# Altium PCB RENEWAA.PcbDoc
Units mil, origin at the board's own origin, x right, y up, seen from the top; angles counter-clockwise.
Board outline 3250 x 1285 mil, 2 copper layers (Top Layer, Bottom Layer); 17 components, 16 nets, 111 pads, 19 vias.
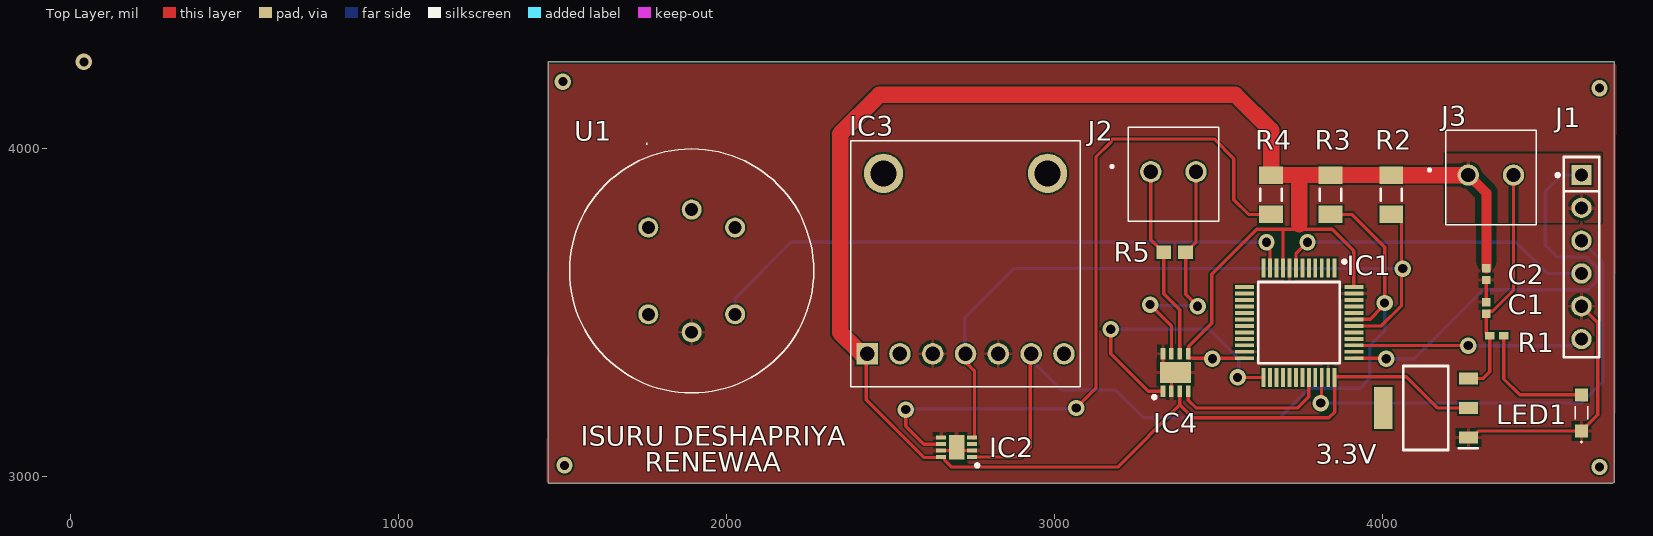
[diagram p0: Top Layer view]
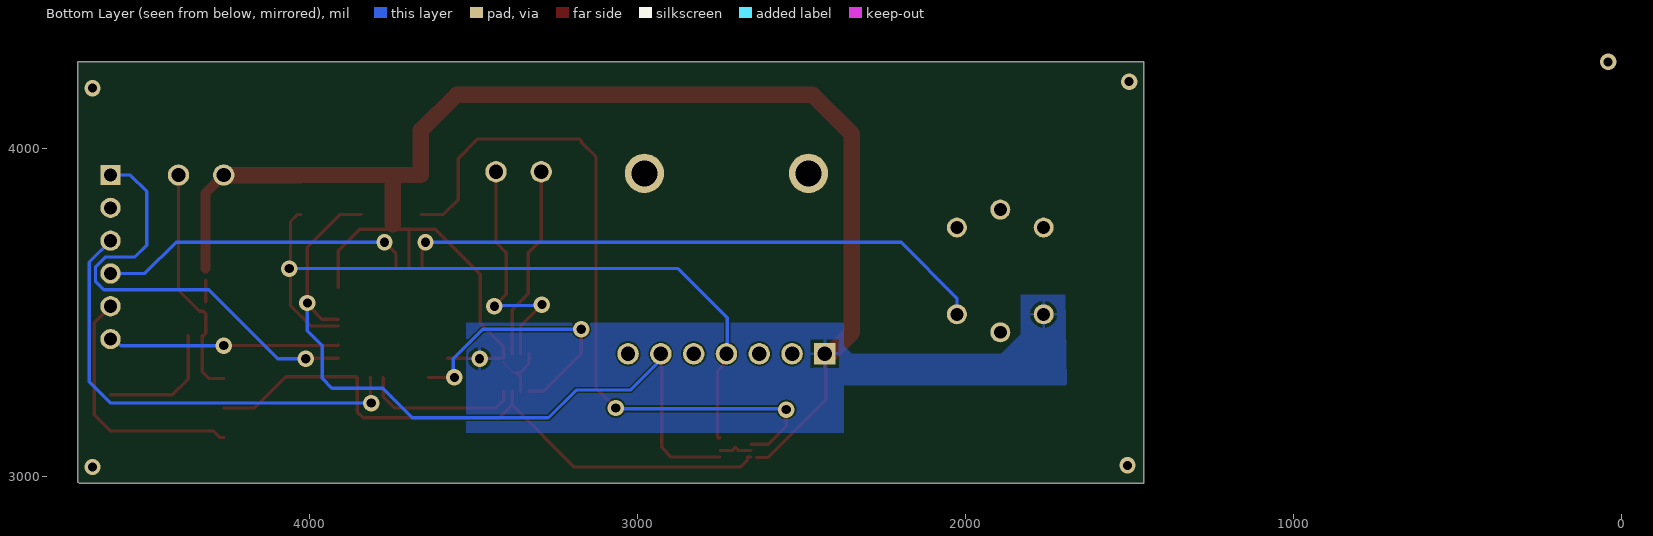
[diagram p1: Bottom Layer view, seen from below]
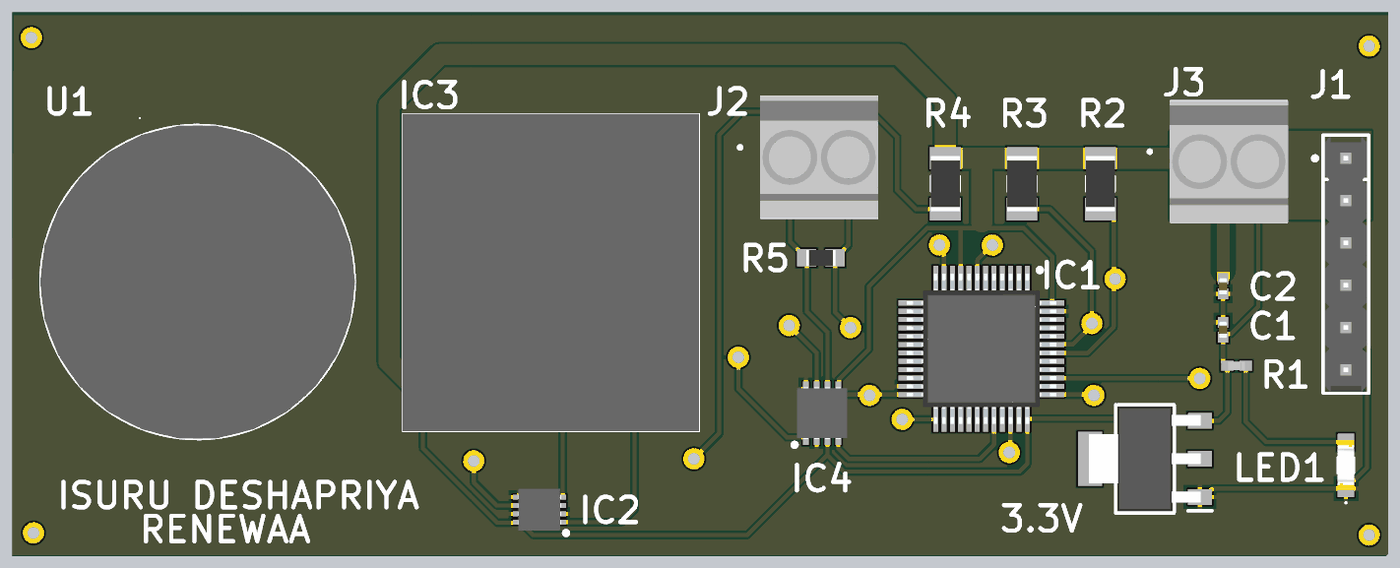
[diagram p2: 3D render of the assembled board from above, using the file's embedded part models]

## Layer stack, top to bottom
Top Solder: solder mask 0.4, Solder Resist, Dk 3.5
Top Layer: signal copper 1.4
Dielectric 1: dielectric 12.6, FR-4, Dk 4.8
Bottom Layer: signal copper 1.4
Bottom Solder: solder mask 0.4, Solder Resist, Dk 3.5

## Board outline
1455,4265 4705,4265 4705,2985 4700,2980 1455,2980

## Design rules (kind name [scope] priority, off if disabled: settings)
Clearance [All] p1: gap=5 ignorepadtopadclearanceinfootprint=FALSE except(1: Poly-Text Text-Text Text-Hole; 10: Poly-Poly Poly-Region)
PolygonConnect [All] p1: connectstyle=Relief reliefconductorwidth=10 reliefentries=4 polygonreliefangle="90 Angle" airgapwidth=10
RoutingVias [All] p1: holewidth=28 width=50 viastyle="Through Hole" minholewidth=28 minwidth=50 maxholewidth=28 maxwidth=50
SolderMaskExpansion [All] p1: expansion=4 istentingtop=FALSE
UnpouredPolygon [All] p1: allowunpoured=TRUE allowshelved=TRUE
Width [All] p1: maxlimit=50 minlimit=5 preferedwidth=5 minimp=50.000000 maximp=50.000000 favimp=50.000000
29 further rules are at their usual default settings.

## Components (designator, comment, footprint, x,y, rotation, side; value= is the part's Value field where it differs from the comment)
3.3V "AMS1117-3.3" SOT229P700X180-4N 4130.36,3210 r180 top
C1 "0.1uF" CAPC1005X56N 4315,3515 r90 top
C2 "0.1uF" CAPC1005X56N 4315,3617.72 r270 top
IC1 "stm32f103c8t6" QFP50P900X900X160-48N 3744.37,3470 r270 top
IC2 "SHT31" SON50P250X250X100-9N-D 2700,3090 r180 top
IC3 "BMP280" 2651 2427.47,3375 r0 top
IC4 "MCP2562-E_MF" SON65P300X300X100-9N-D 3367.8,3317.91 r90 top
J1 "22-28-4060" FP-22-28-4060-MFG 4605,3670 r270 top
J2 "39357-0002" 393570002 3292.2,3930 r0 top
J3 "39357-0002" 393570002 4260,3920 r0 top
LED1 "INPUT_IND" 1221S2CFR2S2L2C 4605,3194.88 r90 top
R1 "220" RESC1005X40N 4346.65,3430 r180 top
R2 "4.7k" RESC3216X60X45ML15T20 4025,3860 r90 top
R3 "4.7k" RESC3216X60X45ML15T20 3840,3860 r90 top
R4 "4.7k" RESC3216X60X45ML15T20 3658.77,3860 r90 top
R5 "120" RESC1609X55X30ML15T15 3365,3685.15 r180 top
U1 "Gas Sensor" 60500009 1760.51,3495.51 r0 top

## Footprints (in the part's own frame and the unit in brackets; to place one, negate y for a bottom-side part, rotate by r counter-clockwise, add the part's x,y. Pads: shape width x height; smd on the part's side, far side on the other; paste and mask are expansions set on the pad)
1221S2CFR2S2L2C [mm]
  rect 1x1 smd: 1(-1.4,0) 2(1.4,0)
  silkscreen extent -2.3,-0.5 0.5,0.5, body extent -1.5,-0.5 1.5,0.5, height 1.94
2651 [mm]
  rect 1.665x1.665 hole 1.11: 1(0,0)
  round 1.665 hole 1.11: 2(2.54,0) 3(5.08,0) 4(7.62,0) 5(10.16,0) 6(12.7,0) 7(15.24,0)
  round 3.048 hole 2.032: MH1(1.27,13.97) MH2(13.97,13.97)
  silkscreen extent -1.27,-2.54 16.51,16.51, body extent -1.27,-2.54 16.51,16.51, height 3.1
60500009 [mm]
  round 1.55 hole 1: 1(0,0) 2(3.359,-1.391) 3(6.718,0) 4(6.718,6.718) 5(3.359,8.109) 6(0,6.718)
  silkscreen extent -6.09,-6.09 12.81,13.23, body extent -6.09,-6.09 12.81,12.81, height 10.1
393570002 [mm]
  round 1.65 hole 1.1: 1(0,0) 2(3.5,0)
  silkscreen extent -3.1,-3.84 5.25,3.45, body extent -1.82,-3.84 5.3,3.44, height 8.43
CAPC1005X56N [mm]
  rect 0.65x0.64 smd: 1(-0.45,0) 2(0.45,0)
  body extent -0.5,-0.25 0.5,0.25, height 0.56
FP-22-28-4060-MFG [mm]
  rect 1.57x1.57 hole 1.02 paste-1000 mask+0: 1(-6.35,0)
  round 1.57 hole 1.02 paste-1000 mask+0: 2(-3.81,0) 3(-1.27,0) 4(1.27,0) 5(3.81,0) 6(6.35,0)
  silkscreen extent -7.75,-1.97 7.75,1.37, body extent -7.85,-1.47 7.85,1.47, height 0.25
QFP50P900X900X160-48N [mm]
  rect 1.475x0.3 smd: 1(-4.238,2.75) 2(-4.238,2.25) 3(-4.238,1.75) 4(-4.238,1.25) 5(-4.238,0.75) 6(-4.238,0.25) 7(-4.238,-0.25) 8(-4.238,-0.75) 9(-4.238,-1.25) 10(-4.238,-1.75) 11(-4.238,-2.25) 12(-4.238,-2.75) 25(4.238,-2.75) 26(4.238,-2.25) 27(4.238,-1.75) 28(4.238,-1.25) 29(4.238,-0.75) 30(4.238,-0.25) 31(4.238,0.25) 32(4.238,0.75) 33(4.238,1.25) 34(4.238,1.75) 35(4.238,2.25) 36(4.238,2.75)
  rect 0.3x1.475 smd: 13(-2.75,-4.238) 14(-2.25,-4.238) 15(-1.75,-4.238) 16(-1.25,-4.238) 17(-0.75,-4.238) 18(-0.25,-4.238) 19(0.25,-4.238) 20(0.75,-4.238) 21(1.25,-4.238) 22(1.75,-4.238) 23(2.25,-4.238) 24(2.75,-4.238) 37(2.75,4.238) 38(2.25,4.238) 39(1.75,4.238) 40(1.25,4.238) 41(0.75,4.238) 42(0.25,4.238) 43(-0.25,4.238) 44(-0.75,4.238) 45(-1.25,4.238) 46(-1.75,4.238) 47(-2.25,4.238) 48(-2.75,4.238)
  silkscreen extent -4.85,-3.15 3.15,3.63, body extent -4.5,-4.5 4.5,4.5, height 1.6
RESC1005X40N [mm]
  rect 0.75x0.6 smd: 1(-0.55,0) 2(0.55,0)
  body extent -0.5,-0.25 0.5,0.25, height 0.35
RESC1609X55X30ML15T15 [mm] "Chip Resistor, 2-Leads, Body 1.75x0.95mm, IPC Low Density"
  rect 1.15x1.05 smd: 1(-0.85,0) 2(0.85,0)
  body extent -0.87,-0.48 0.87,0.48, height 0.55
RESC3216X60X45ML15T20 [mm] "Chip Resistor, 2-Leads, Body 3.3x1.75mm, IPC Low Density"
  rect 1.35x1.85 smd: 1(-1.525,0) 2(1.525,0)
  silkscreen extent -0.45,-0.82 0.45,0.82, body extent -1.65,-0.87 1.65,0.87, height 0.6
SON50P250X250X100-9N-D [mm]
  rect 0.8x0.3 smd: 1(-1.2,0.75) 2(-1.2,0.25) 3(-1.2,-0.25) 4(-1.2,-0.75) 5(1.2,-0.75) 6(1.2,-0.25) 7(1.2,0.25) 8(1.2,0.75)
  rect 1.2x1.9 smd: 9(0,0)
  silkscreen extent -1.73,1.28 -1.48,1.52, body extent -1.3,-1.25 1.3,1.25, height 1
SON65P300X300X100-9N-D [mm]
  rect 0.9x0.35 smd: 1(-1.45,0.975) 2(-1.45,0.325) 3(-1.45,-0.325) 4(-1.45,-0.975) 5(1.45,-0.975) 6(1.45,-0.325) 7(1.45,0.325) 8(1.45,0.975)
  rect 1.6x2.4 smd: 9(0,0)
  silkscreen extent -2.02,1.52 -1.78,1.77, body extent -1.55,-1.5 1.55,1.5, height 1
SOT229P700X180-4N [mm]
  rect 1.45x0.95 smd: 1(-3.3,2.29) 2(-3.3,0) 3(-3.3,-2.29)
  rect 1.45x3.25 smd: 4(3.3,0)
  silkscreen extent -4.03,-3.25 1.75,3.25, body extent -3.35,-3.15 3.35,3.15, height 1.8

## Part data
3.3V: "Integrated Circuit", Manufacturer_Name=Advanced, Datasheet Link=https://datasheet.datasheetarchive.com/originals/distributors/Datasheets-28/DSA-550594.pdf, Height=1.8mm, Manufacturer_Part_Number=AMS1117-3.3
C1 C2: library part 04024D106MAT2A, "Capacitor", Manufacturer_Name="Kyocera AVX", Mouser Part Number=581-04024D106MAT2A, Datasheet Link=http://www.mouser.com/catalog/supplier/library/pdf/AVXSurfaceMountCeramic.pdf, Height=0.56mm, Manufacturer_Part_Number=04024D106MAT2A, Mouser Price/Stock=https://www.mouser.co.uk/ProductDetail/KYOCERA-AVX/04024D106MAT2A?qs=NBFAU1oqP4W0zKsr62mI7A%3D%3D
IC1: "Integrated Circuit", Arrow Part Number=STM32F103C8T6, Manufacturer_Name=STMicroelectronics, Mouser Part Number=511-STM32F103C8T6, Arrow Price/Stock=https://www.arrow.com/en/products/stm32f103c8t6/stmicroelectronics?utm_currency=USD&region=nac, Datasheet Link=http://media.digikey.com/pdf/Data%20Sheets/ST%20Microelectronics%20PDFS/STM32F103x8,B.pdf, Height=1.6mm, Manufacturer_Part_Number=stm32f103c8t6, Mouser Price/Stock=https://www.mouser.co.uk/ProductDetail/STMicroelectronics/STM32F103C8T6?qs=bhCVus9SdFtq6kqxsU5%2FDA%3D%3D
IC2: library part SHT31-DIS-B10KS, "Integrated Circuit", Manufacturer_Name=Sensirion, Mouser Part Number=403-SHT31-DIS-B10KS, Arrow Part Number=SHT31-DIS-B10KS, Arrow Price/Stock=https://www.arrow.com/en/products/sht31-dis-b10ks/sensirion-ag?utm_currency=USD&region=nac, Datasheet Link=https://www.arrow.com/en/products/sht31-dis-b10ks/sensirion-ag?region=nac, Height=1mm, Manufacturer_Part_Number=SHT31-DIS-B10KS, Mouser Price/Stock=https://www.mouser.co.uk/ProductDetail/Sensirion/SHT31-DIS-B10kS?qs=MLItCLRbWswwYf53rVT5pw%3D%3D
IC3: library part 2651, "Integrated Circuit", Manufacturer_Name=Adafruit, Mouser Part Number=485-2651, Arrow Part Number=2651, Arrow Price/Stock=https://www.arrow.com/en/products/2651/adafruit-industries?region=nac, Datasheet Link=https://learn.adafruit.com/downloads/pdf/adafruit-bmp280-barometric-pressure-plus-temperature-sensor-breakout.pdf, Height=3mm, Manufacturer_Part_Number=2651, Mouser Price/Stock=https://www.mouser.co.uk/ProductDetail/Adafruit/2651?qs=GP1oqPAcsMG0HimHwVa7aA%3D%3D
IC4: "Integrated Circuit", Arrow Part Number=MCP2562-E/MF, Manufacturer_Name=Microchip, Mouser Part Number=579-MCP2562-E/MF, Arrow Price/Stock=https://www.arrow.com/en/products/mcp2562-emf/microchip-technology?region=europe, Datasheet Link=http://uk.rs-online.com/web/p/products/1652039, Height=1mm, Manufacturer_Part_Number=MCP2562-E/MF, Mouser Price/Stock=https://www.mouser.co.uk/ProductDetail/Microchip-Technology/MCP2562-E-MF?qs=6qKXPk0vzx2iHVWjPcssaQ%3D%3D
J1: library part CMP-04776-000763-1, "CONN HEADER VERT 6POS 2.54MM", Color=Black, Contact Resistance=20mR, Current Rating=4A, Max Operating Temperature=75°C, Max Voltage Rating (AC)=250V, Max Voltage Rating (DC)=250.25kV, Min Operating Temperature=0°C, Package Quantity=1, Connector Type="Male Pin", Contact Material=Brass, Contact Mating Length=0.24inch, Contact Plating=Tin, Contact Type="Male Pin", Depth=2.49mm, Gender=Male, Housing Color=Black, Housing Material=Thermoplastic, Length=15.24mm, Mount="Through Hole", Number of Contacts=6, Number of Positions=6, Number of Rows=1, Orientation=Straight, Packaging=Bulk, Pitch=2.54mm, RoHS Compliant=Yes, Series="KK® 42375", Termination=Solder, Voltage Rating=250V
J2 J3: "Connector", Manufacturer_Name=Molex, Mouser Part Number=538-39357-0002, Datasheet Link=https://www.molex.com/pdm_docs/sd/393570002_sd.pdf, Height=8.64mm, Manufacturer_Part_Number=39357-0002, Mouser Price/Stock=https://www.mouser.co.uk/ProductDetail/Molex/39357-0002?qs=c7V%252BsbZfmqvL0V%252BWJEAGdg%3D%3D
LED1: library part 12-21_S2C-FR2S2L_2C, "LED", Manufacturer_Name=Everlight, Manufacturer_Part_Number=12-21/S2C-FR2S2L/2C, Datasheet Link=https://datasheet.lcsc.com/szlcsc/1901141904_Everlight-Elec-12-21-S2C-FR2S2L-2C_C183856.pdf, Height=2.2mm
R1: library part CR0402-FX-2200GLF, "Resistor", Manufacturer_Name=Bourns, Mouser Part Number=652-CR0402FX-2200GLF, Arrow Part Number=CR0402-FX-2200GLF, Arrow Price/Stock=https://www.arrow.com/en/products/cr0402-fx-2200glf/bourns, Datasheet Link=https://www.bourns.com/pdfs/CR0402.pdf, Height=0.4mm, Manufacturer_Part_Number=CR0402-FX-2200GLF, Mouser Price/Stock=https://www.mouser.co.uk/ProductDetail/Bourns/CR0402-FX-2200GLF?qs=JflQ4L8so%2FsKYc57KXfYtQ%3D%3D
R2 R3 R4: library part CMP-2100-03618-1, "Chip Resistor, 4.7 KOhm, +/- 1%, 0.25 W, -55 to 155 degC, 1206 (3216 Metric), RoHS, Tape and Reel", Case Code (Imperial)=1206, Case Code (Metric)=3216, Manufacturer="Vishay Semiconductor", Max Operating Temperature=155degC, Max Power Dissipation=250mW, Min Operating Temperature=-55degC, Package Description="2-Pin Surface Mount Device, Body 3.15 x 1.6 mm", Package Quantity=10, Package Reference=1206.0, Resistance=4.7KOhm, Temperature Coefficient=100ppm/degreesC, Tolerance=1%, Voltage Rating=200V, Case/Package=1206, Composition=ThickFilm, Contact Plating=Tin, Datasheet URL=http://www.vishay.com/docs/20035/dcrcwe3.pdf, Datasheet Version=41061.0, Depth=1.6mm, Height=0.55mm, Lead Free=LeadFree, Length=3.2mm, Manufacturer URL=http://www.vishay.com/, Military Standard=Not, Mount=SurfaceMount, Number of Terminations=2, Packaging=TapeandReel, Power Rating=250mW, Radiation Hardening=No, REACH SVHC=Unknown, RoHSCompliant=true, Termination=SMD/SMT, Voltage Rating (DC)=200V, Weight=0.000353oz, Width=1.6mm
R5: library part CMP-2000-00213-2, "Chip Resistor, 120 Ohm, +/- 1%, 0.1 W, -55 to 155 degC, 0603 (1608 Metric), RoHS, Tape and Reel", Case Code (Imperial)=0603, Case Code (Metric)=1608, Manufacturer=Panasonic, Max Operating Temperature=155degC, Max Power Dissipation=100mW, Min Operating Temperature=-55degC, Package Description="2-Pin Surface Mount Device, Body 1.6 x 0.85 mm", Package Quantity=1, Resistance=120Ohm, Temperature Coefficient=100ppm/degreesC, Tolerance=1%, Voltage Rating=75V, Case/Package=0603, Composition=ThickFilm, Contact Plating=Tin, Datasheet URL=https://industrial.panasonic.com/cdbs/www-data/pdf/RDA0000/AOA0000C283.pdf, Datasheet Version=42095.0, Depth=0.8mm, Height=0.022inch, Lead Free=LeadFree, Length=1.6mm, Manufacturer URL=http://www.panasonic.com/, Military Standard=Not, Mount=SurfaceMount, Number of Pins=2, Number of Terminations=2, Package Reference=0603, Package URL=http://www.st.com/st-web-ui/static/active/en/resource/technical/document/datasheet/CD00001320.pdf, Packaging=TapeandReel, Power Rating=100mW, Radiation Hardening=No, REACH SVHC=NoSVHC, RoHSCompliant=true, Termination=SMD/SMT, Voltage Rating (DC)=75V, Width=0.031inch
U1: library part 605-00009, "MQ-2", Manufacturer_Name=Parallax, Mouser Part Number=619-605-00009, Datasheet Link=https://datasheet.datasheetarchive.com/originals/distributors/DKDS-18/349907.pdf, Height=10mm, Manufacturer_Part_Number=605-00009, Mouser Price/Stock=https://www.mouser.co.uk/ProductDetail/Parallax/605-00009?qs=c8dSG9xvwkc3Fl0aFi4nyw%3D%3D

## Via types
v1: diameter 50, hole 28, Top Layer to Bottom Layer, 19 vias

## Nets (pads, with @x,y where several pads share a name; then routed paths per layer and width w, separated by ;. In a path a pad name is that pad's centre, name@x,y a point inside that pad or via, vN(x,y) a via of type N, cw(c..) or ccw(c..) an arc to the next point about the centre after c; other vN are vias at no path point)
3.3V: 3.3V.2 C2.1 IC1.9 IC1.24 IC1.36 IC1.48 IC2.8 IC3.1 IC4.3 IC4.5 J1.2 J3.1 R2.2 R3.2 R4.2 U1.1 | length 6861.8
  Top Layer w10: IC3.1 2410,3375 2425,3360 2425,3235 2600.75,3059.25 2635,3059.25 ; IC2.8 2662.6,3060.47 2663.5,3059.57 2663.5,3051.33 2684.83,3030 3191.18,3030 3380.59,3219.41 ; IC4.3 3380.59,3219.41 ; IC1.24@3571.68,3360.83 3572.59,3361.73 IC1.24 ; IC1.24@3571.68,3361.73 3419.45,3361.73 3418.9,3362.28 3408.07,3362.28 3406.18,3364.17 IC4.5 3408.07,3376.89 3408.07,3398.07 3478.27,3468.27 3478.27,3617.88 3615.26,3754.87 3690,3754.87 ; IC1.9 3695.16,3749.71 3690,3754.87 ; IC1.36 3852.64,3197.64 3835,3180 3420,3180 3380.59,3219.41 ; IC1.36@3855,3305 4070.87,3305 4165.87,3210 3.3V.2 ; IC1.48 3911.22,3688.78 3845.13,3754.87 3690,3754.87 ; R2.2 R2.2
  Top Layer w30: J3.1 4315,3865 C2.1
  Top Layer w50: IC3.1@2410,3375 2345,3440 2345,4045 2465,4165 3550,4165 3658.77,4056.23 R4.2 3744.96,3920.04 ; 3744.96,3770 3744.96,3920.04 ; R2.2 R3.2 3744.96,3920.04 ; R2.2 J3.1
  other v1: 3480,3360
5-12V: 3.3V.3 C1.1 J3.2 R1.2 | length 719.7
  Top Layer w10: 3.3V.3 4305.16,3300.16 4325,3320 R1.2 4322.05,3430 4315,3437.05 C1.1 4322.6,3504.92 4333.81,3504.92 4397.8,3568.9 J3.2
CAN_RX: IC1.32 IC4.4 | length 477.9
  Top Layer w10: IC4.4 3406.18,3233.82 3430,3210 3740,3210 3773.9,3243.9 IC1.32
CAN_TX: IC1.25 IC4.1 | length 834
  Top Layer w10: v1@3170,3435 3170,3375 3284.17,3260.83 IC4.1 ; v1@3555,3305 v1(3556.85,3303.15) IC1.25
  Bottom Layer w10: v1(3170,3450) 3470,3450 3560,3360 3560,3306.3 v1(3556.85,3303.15)
CANH: IC4.7 J2.2 R5.1 | length 768.3
  Top Layer w10: v1(3290,3525) 3355,3460 IC4.7 ; J2.2 3430,3714.71 3400.43,3685.15 R5.1 3398.46,3556.54 v1(3435,3520) v1@3440,3520
  Bottom Layer w10: v1(3290,3525) 3292.5,3522.5 3432.5,3522.5 v1(3435,3520)
CANL: IC4.6 J2.1 R5.2 | length 592.8
  Top Layer w10: J2.1 3292.2,3722.51 3329.57,3685.15 R5.2 3331.54,3558.46 3380.59,3509.41 IC4.6
Gas: IC1.11 U1.3 | length 1822.5
  Top Layer w10: v1(3645,3715) 3645,3704.18 3655.79,3693.39 IC1.11
  Bottom Layer w10: U1.3 2025,3545 2195,3715 v1(3645,3715)
GND: 3.3V.1 C1.2 C2.2 IC1.8 IC1.23 IC1.35 IC1.47 IC2.2 IC2.5 IC2.7 IC2.9 IC3.3 IC3.5 IC4.2 IC4.8 IC4.9 J1.5 LED1.1 U1.2 | length 1141.1
  Top Layer w5: IC4.9 3378.13,3317.91 3407.13,3346.91 3407.13,3349.78
  Top Layer w10: IC2.7 2690.16,3080.16 IC2.9 2709.84,3080.16 IC2.2 ; IC4.8 3329.41,3344.41 3355.91,3317.91 IC4.9 3355,3305.12 IC4.2 ; 3.3V.1 4270.13,3119.84 4290.05,3139.76 LED1.1 4655,3189.76 4655,3470 J1.5 ; C1.2 C2.2
NetLED1_2: LED1.2 R1.1 | length 388.4
  Top Layer w10: R1.1 4368.31,3298.31 4416.61,3250 LED1.2
NRESET: IC2.6 R4.1 | length 2225
  Top Layer w10: v1(2545,3205) 2545,3155 2600.16,3099.84 IC2.6 ; v1@3060,3210 v1(3065,3210) 3125,3270 3125,3975 3170,4020 3170,4024.14 3175.86,4030 3485,4030 3545,3970 3545,3845 3590.04,3799.96 R4.1
  Bottom Layer w10: v1(2545,3205) 2547.5,3207.5 3062.5,3207.5 v1(3065,3210)
NRST: IC1.7 J1.4 | length 967.2
  Top Layer w10: IC1.7 3734.53,3679.53 v1(3770,3715)
  Bottom Layer w10: v1(3770,3715) 4405,3715 4500,3620 J1.4
SCL: IC1.42 IC2.4 IC3.4 R2.1 | length 2253.2
  Top Layer w10: IC3.4@2725,3360 2725,3352.44 2755,3322.44 2755,3120.43 2754.09,3119.53 IC2.4 ; IC1.42 3916.8,3460.16 3916.96,3460 3995,3460 4056.42,3521.42 4056.42,3631.42 v1(4060,3635) 4056.42,3638.58 4056.42,3778.39 4034.84,3799.96 R2.1
  Bottom Layer w10: IC3.4@2725,3360 2725,3485 2875,3635 v1(4060,3635)
SDA: IC1.43 IC2.1 IC3.6 R3.1 | length 2342.6
  Top Layer w10: IC2.1 2895.47,3060.47 2925,3090 IC3.6@2925,3360 ; R3.1 3905.04,3799.96 4005,3700 v1(4005,3530) ; IC1.43 3912.13,3480.75 3960.75,3480.75 v1@3995,3515
  Bottom Layer w10: IC3.6@2925,3360 3020.31,3264.69 3185.31,3264.69 3270,3180 3685,3180 3775,3270 3930,3270 3960,3300 3960,3400 4005,3445 v1(4005,3530)
SWCLK: IC1.37 J1.1 | length 1349.7
  Top Layer w10: IC1.37 3998.27,3361.73 v1@4000,3360
  Bottom Layer w10: v1(4010,3360) 4095,3360 4305,3570 4625,3570 4650.86,3595.86 4650.86,3639.14 4619.57,3670.43 4530.43,3670.43 4495,3705.86 4495,3870 4545,3920 J1.1
SWIO: IC1.34 J1.3 | length 1423.4
  Top Layer w10: v1(3810,3225) 3812.36,3227.36 3812.36,3302.24 IC1.34
  Bottom Layer w10: v1(3810,3225) 4605,3225 4670,3290 4670,3655 J1.3
SWO: IC1.39 J1.6 | length 702.5
  Top Layer w10: IC1.39 3911.77,3400.55 4259.45,3400.55 v1(4260,3400)
  Bottom Layer w10: v1(4260,3400) 4573.24,3400 4593.24,3420 J1.6
pads on no net: 3.3V.4 IC1.1 IC1.2 IC1.3 IC1.4 IC1.5 IC1.6 IC1.10 IC1.12 IC1.13 IC1.14 IC1.15 IC1.16 IC1.17 IC1.18 IC1.19 IC1.20 IC1.21 IC1.22 IC1.26 IC1.27 IC1.28 IC1.29 IC1.30 IC1.31 IC1.33 IC1.38 IC1.40 IC1.41 IC1.44 IC1.45 IC1.46 IC2.3 IC3.2 IC3.7 IC3.MH1 IC3.MH2 U1.4 U1.5 U1.6
copper on no net:
  other v1: 4660,3030 1505,3035 4660,4185 1500,4205 40,4265

## Polygon pours and split planes (outlines as drawn)
3.3V on Top Layer "3.3V_L01_P003" (solid, pour order 3): 4190,3990 4195,3985 4665,3985 4665,3775 4190,3775
GND on Top Layer "GND_L01_P000" (solid, pour order 0): 1451.25,2982.5 4706.25,2982.5 4711.25,4257.5 1458.75,4257.5
3.3V on Bottom Layer "3.3V_L02_P004" (solid, pour order 4): 2370,3475 2375,3470 3520,3470 3520,3135 3515,3135 3500,3135 2370,3135
3.3V on Bottom Layer "3.3V_L02_P001" (solid, pour order 1): 1695,3555 1830,3555 1830,3435 1890,3375 2345,3375 2385,3415 2470,3415 2470,3330 2420,3280 1690,3280

## Silkscreen, mask and mechanical layers (free items; w line width, h text height)
Top Overlay:
  text "ISURU DESHAPRIYA" at 1555,3095 h60
  text "RENEWAA" at 1750,3015 h60
Mechanical 1:
  lines w47.24: 1000,1000 1000,5000 7000,5000 7000,1000 1000,1000